# EAGLE board eagle_Ultrasonic sensor arduino (EAGLE 9.5.1)
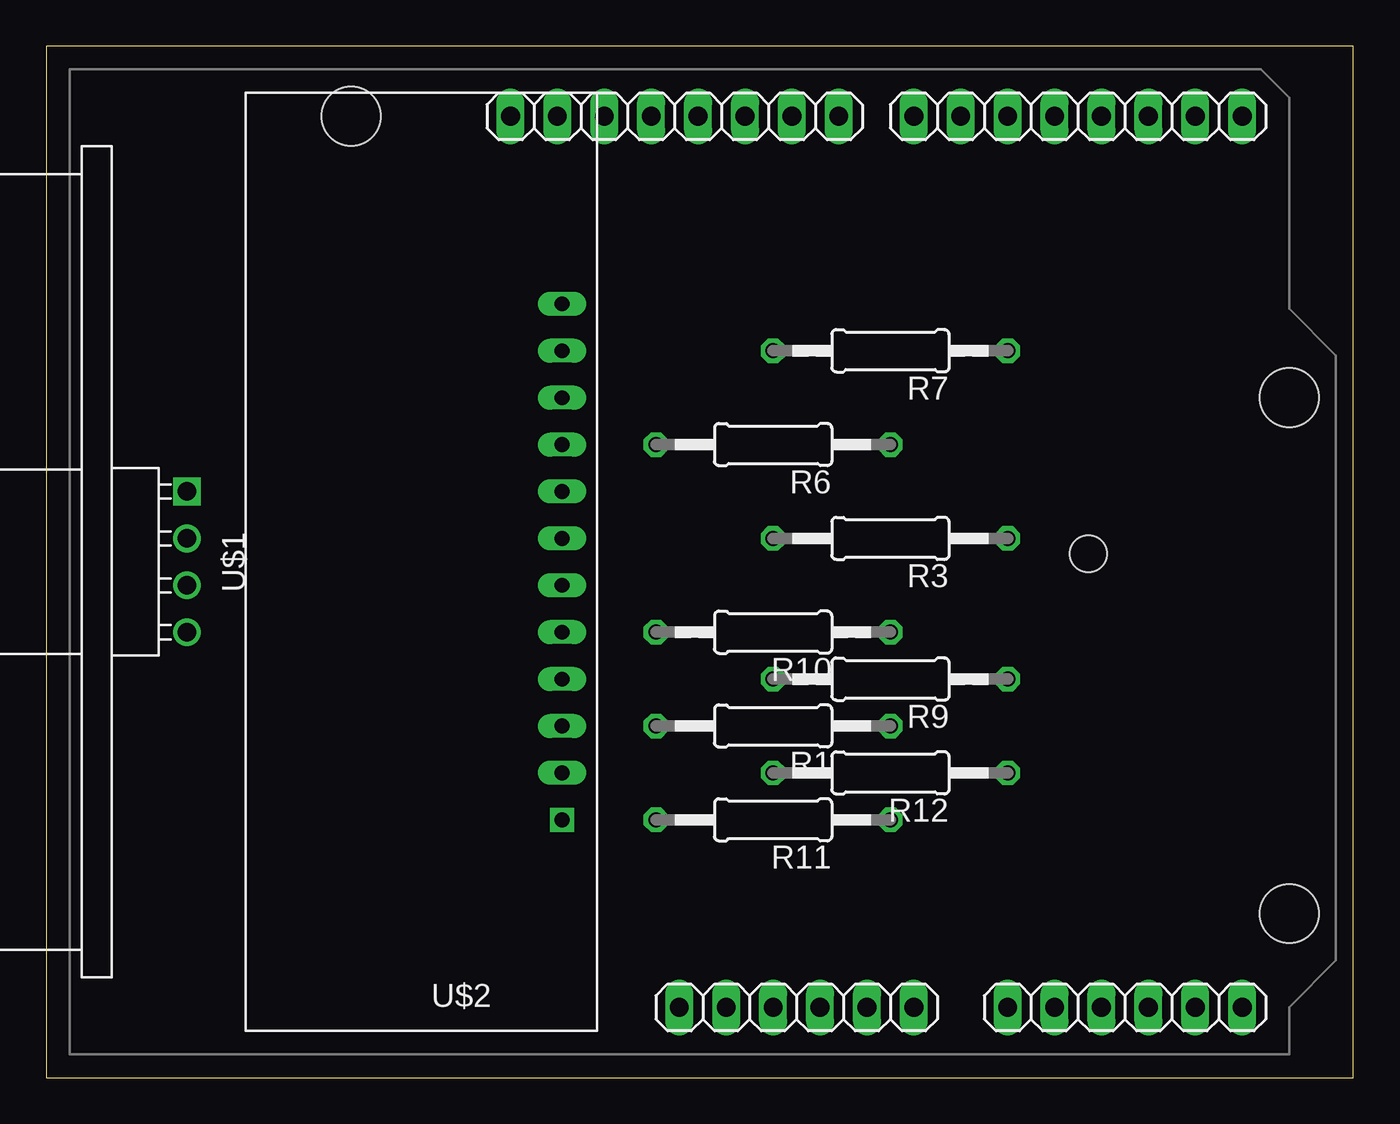
[diagram p0: board, top side]
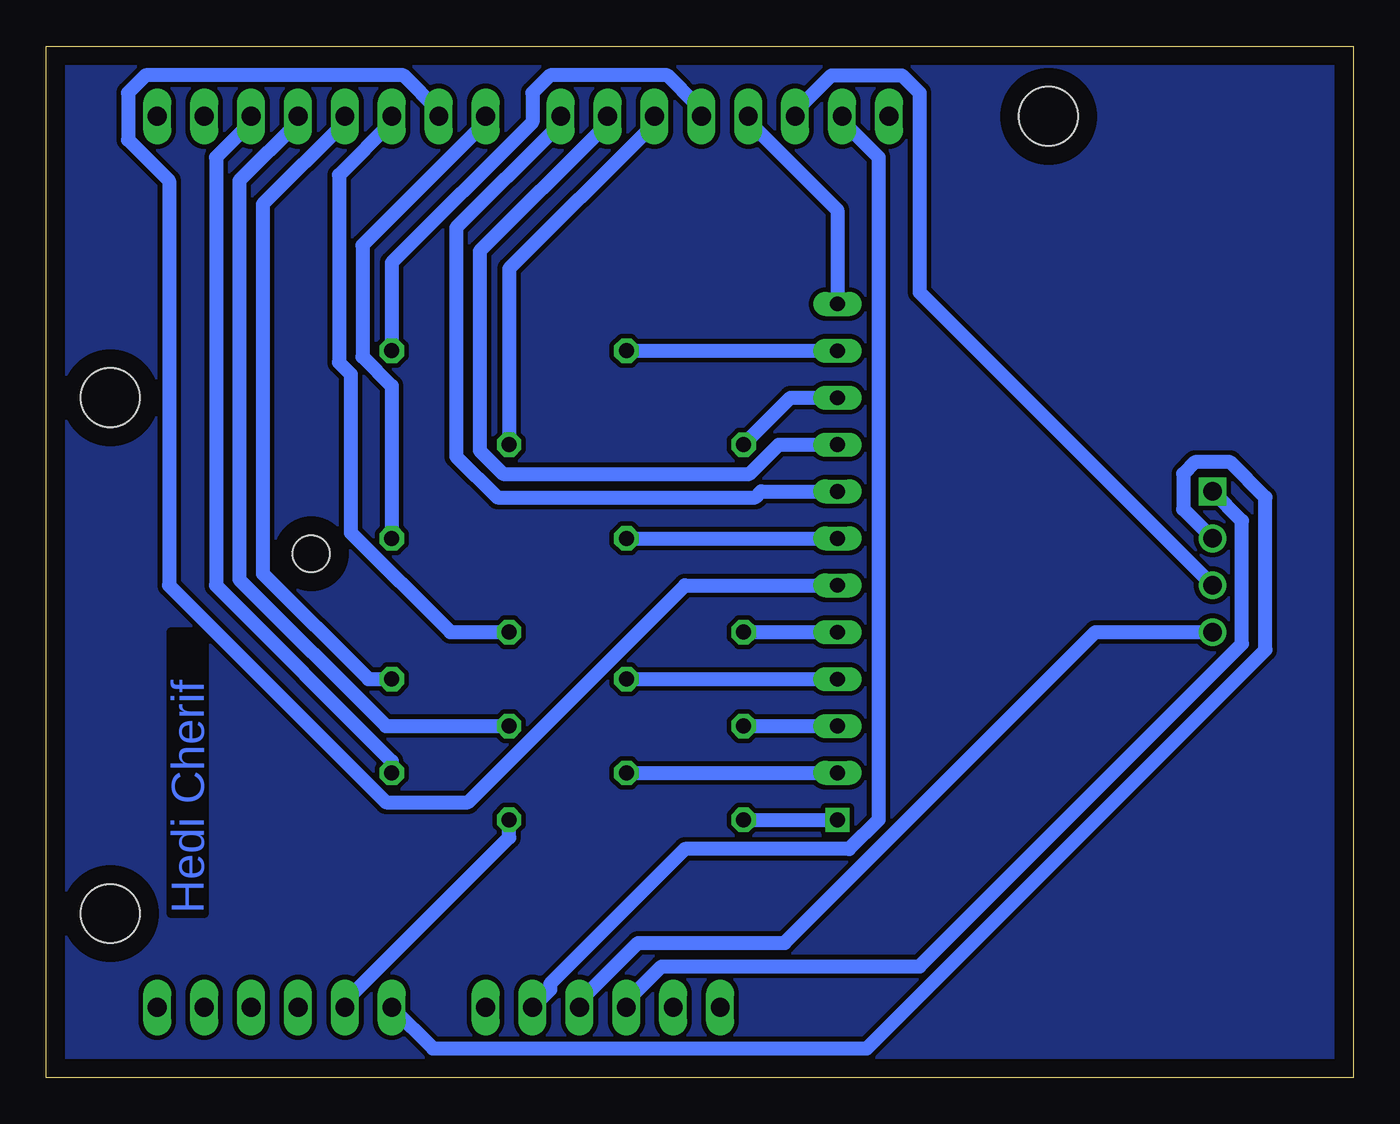
[diagram p1: board, bottom side, seen from below]

Size 70.79 x 55.87 mm. Coordinates in mm from the lower left corner, seen from the top.
Outline: 0,0 70.79,0 70.79,55.87 0,55.87 0,0
Copper layers (1*16): Top 0.035mm / dielectric 0.15mm / Bottom 0.035mm
Design rules "default": minimum track width 6mil, minimum drill 0.35mm, track to track 6mil, track to pad 6mil, pad to pad 6mil, via to via 6mil, smd to smd 6mil, copper to edge 40mil, drill to drill 6mil, minimum pad ring 10mil, minimum via ring 8mil, stop-mask expansion 4mil, vias tented up to drill 0mil, thermal gap 10mil
Net classes: 0 default: width 0.762 mm, drill 0.9 mm, clearance 0.254 mm

## Footprints (pad centres in the part's own frame; a part is rotated, then mirrored left to right if it is on the bottom)
ARDUINO2009 = drill 1.016 long: 1 33.02,2.54; 2 35.56,2.54; 3 38.1,2.54; 4 40.64,2.54; 5 43.18,2.54; 6 45.72,2.54; 7 50.8,2.54; 8 53.34,2.54; 9 55.88,2.54; 10 58.42,2.54; 11 60.96,2.54; 12 63.5,2.54; 13 63.5,50.8; 14 60.96,50.8; 15 58.42,50.8; 16 55.88,50.8; 17 53.34,50.8; 18 50.8,50.8; 19 48.26,50.8; 20 45.72,50.8; 21 41.656,50.8; 22 39.116,50.8; 23 36.576,50.8; 24 34.036,50.8; 25 31.496,50.8; 26 28.956,50.8; 27 26.416,50.8; 28 23.876,50.8 | hole 3.2: 15.24,50.8; 66.04,35.56; 66.04,7.62 | hole 2: 55.17,27.114
0207/12 = drill 0.813 octagon: 1 -6.35,0; 2 6.35,0
ULTRASONIC-HC-SR04#V = drill 1 square: 1 -3.81,0 | drill 1: 2 -1.27,0; 3 1.27,0; 4 3.81,0
NFD-5641 = drill 0.8 square: P$1 -13.97,-7.62 | drill 0.8 long: P$2 -11.43,-7.62; P$3 -8.89,-7.62; P$4 -6.35,-7.62; P$5 -3.81,-7.62; P$6 -1.27,-7.62; P$7 1.27,-7.62; P$8 3.81,-7.62; P$9 6.35,-7.62; P$10 8.89,-7.62; P$11 11.43,-7.62; P$12 13.97,-7.62

## Placement (x,y rotation side)
IC2  [ARDUINO2009]  1.27,1.27 0 top
R1  150  [0207/12]  39.37,19.05 180 top
R3  [0207/12]  45.72,29.21 180 top
R6  [0207/12]  39.37,34.29 180 top
R7  [0207/12]  45.72,39.37 180 top
R9  150  [0207/12]  45.72,21.59 180 top
R10  150  [0207/12]  39.37,24.13 180 top
R11  150  [0207/12]  39.37,13.97 180 top
R12  150  [0207/12]  45.72,16.51 180 top
U$1  ULTRASONIC-HC-SR04#V  [ULTRASONIC-HC-SR04#V]  7.62,27.94 270 top
U$2  KW4-563ASA  [NFD-5641]  20.32,27.94 90 top

## Library data of the parts
IC2 = arduino
R1 R3 R6 R7 R9-R12 = rcl; SPICEPREFIX: R
U$1 = diy-modules
U$2 = KW4-563ASA

## Nets
+3V3: IC2.2
GND: IC2.5 IC2.27
N$1: R7.2 U$2.P$11
N$2: R3.2 U$2.P$7
N$3: R9.2 U$2.P$4
N$4: R12.2 U$2.P$2
N$5: IC2.7 U$1.2
N$6: R6.2 U$2.P$10
N$7: R10.2 U$2.P$5
N$8: R1.2 U$2.P$3
N$9: IC2.25 U$2.P$12
N$10: IC2.22 U$2.P$9
N$11: IC2.21 U$2.P$8
N$12: IC2.19 U$2.P$6
N$13: IC2.4 U$1.4
N$14: IC2.3 U$1.1
N$15: IC2.8 R11.1
N$16: IC2.26 U$1.3
N$18: IC2.24 R7.1
N$19: IC2.23 R6.1
N$22: IC2.20 R3.1
N$24: IC2.15 R12.1
N$25: IC2.16 R1.1
N$26: IC2.17 R9.1
N$27: IC2.18 R10.1
N$28: R11.2 U$2.P$1

## Tracks (layer width: path | path; a pad name or v marks a point on that pad's centre or on a via)
GND
  Bottom 0.762: IC2.5 43.5,4.76 43.5,5.08 36.2,12.38 27.31,12.38 25.72,13.97 25.72,49.85 27.94,52.07 IC2.27
N$1
  Bottom 0.762: R7.2 U$2.P$11
N$2
  Bottom 0.762: R3.2 U$2.P$7
N$3
  Bottom 0.762: R9.2 U$2.P$4
N$4
  Bottom 0.762: R12.2 U$2.P$2
N$5
  Bottom 0.762: U$1.2 9.21,30.8 9.21,32.7 8.57,33.34 6.67,33.34 4.76,31.43 4.76,23.18 26.35,1.59 49.85,1.59 IC2.7
N$6
  Bottom 0.762: U$2.P$10 30.48,36.83 R6.2
N$7
  Bottom 0.762: R10.2 U$2.P$5
N$8
  Bottom 0.762: R1.2 U$2.P$3
N$9
  Bottom 0.762: U$2.P$12 27.94,46.99 33.02,52.07 IC2.25
N$10
  Bottom 0.762: U$2.P$9 31.11,34.29 32.7,32.7 46.04,32.7 47.31,33.97 47.31,44.77 40.64,51.44 40.64,52.07 IC2.22
N$11
  Bottom 0.762: U$2.P$8 32.07,31.75 32.39,31.43 46.36,31.43 48.58,33.66 48.58,46.04 43.18,51.44 43.18,52.07 IC2.21
N$12
  Bottom 0.762: U$2.P$6 36.2,26.67 47.94,14.92 52.39,14.92 64.13,26.67 64.13,48.58 66.36,50.8 66.36,53.34 65.41,54.29 51.44,54.29 49.53,52.39 IC2.19
N$13
  Bottom 0.762: U$1.4 13.97,24.13 30.8,7.3 38.73,7.3 41.91,4.13 IC2.4
N$14
  Bottom 0.762: U$1.1 6.03,30.16 6.03,23.49 23.5,6.03 37.47,6.03 39.37,4.13 IC2.3
N$15
  Bottom 0.762: R11.1 45.72,13.02 54.61,4.13 IC2.8
N$16
  Bottom 0.762: U$1.3 23.5,42.55 23.5,53.34 24.45,54.29 28.26,54.29 30.48,52.07 IC2.26
N$17
  pour Bottom: 0,55.88 0,0 71.12,0 71.12,55.88
N$18
  Bottom 0.762: R7.1 52.07,44.13 44.45,51.75 44.45,53.34 43.5,54.29 37.15,54.29 35.56,52.7 35.56,52.07 IC2.24
N$19
  Bottom 0.762: R6.1 45.72,43.81 38.1,51.44 38.1,52.07 IC2.23
N$22
  Bottom 0.762: R3.1 52.07,37.46 53.66,39.05 53.66,45.09 46.99,51.75 IC2.20
N$24
  Bottom 0.762: R12.1 52.07,17.14 61.59,26.67 61.59,49.85 59.69,51.75 IC2.15
N$25
  Bottom 0.762: R1.1 52.39,19.05 60.33,26.99 60.33,48.58 57.15,51.75 IC2.16
N$26
  Bottom 0.762: R9.1 53.34,21.59 59.05,27.3 59.05,47.31 54.61,51.75 IC2.17
N$27
  Bottom 0.762: R10.1 48.89,24.13 54.29,29.53 54.29,38.1 54.93,38.73 54.93,48.89 52.07,51.75 IC2.18
N$28
  Bottom 0.762: R11.2 U$2.P$1

## Text on the board
Bottom: Hedi Cherif